# EAGLE board LEDDriver (EAGLE 6.5.0)
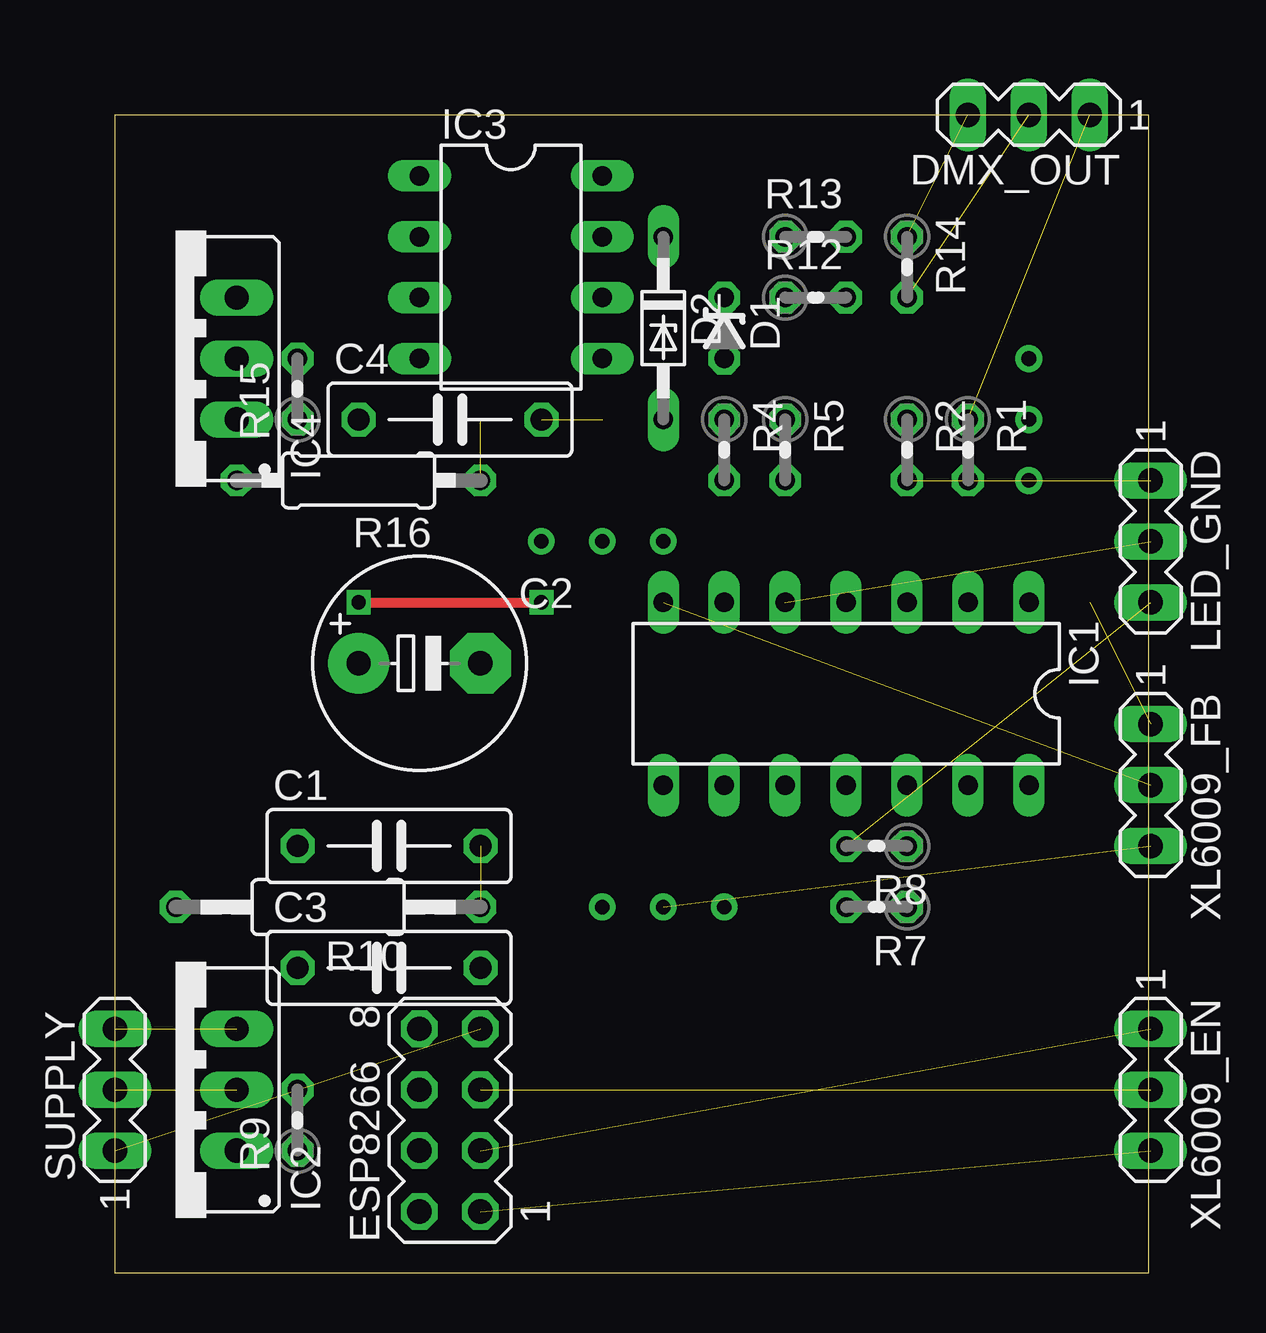
[diagram p0: board, top side]
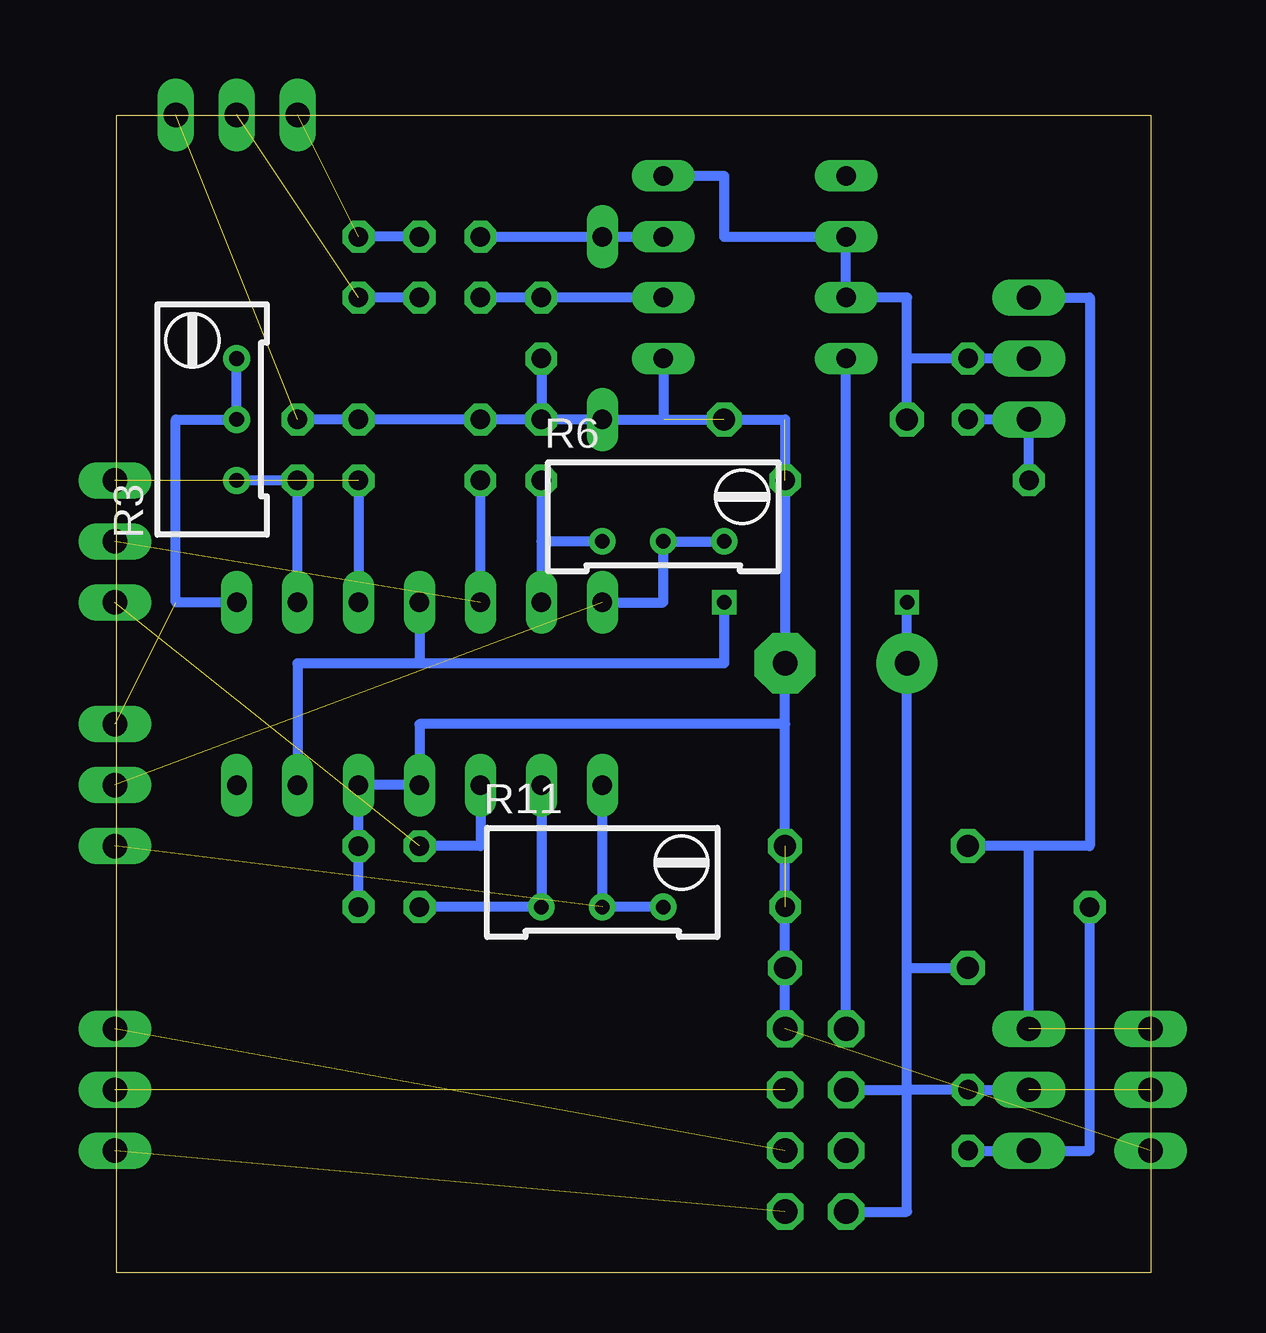
[diagram p1: board, bottom side, seen from below]

Size 43.1 x 48.25 mm. Coordinates in mm from the lower left corner, seen from the top.
Outline: 0,0 43.1,0 43.1,48.25 0,48.25 0,0
Copper layers (1*16): Top 0.035mm / dielectric 1.5mm / Bottom 0.035mm
Design rules "default": minimum track width 10mil, minimum drill 24mil, track to track 8mil, track to pad 8mil, pad to pad 8mil, via to via 8mil, smd to smd 8mil, copper to edge 40mil, drill to drill 8mil, minimum pad ring 10mil, minimum via ring 8mil, stop-mask expansion 4mil, vias tented up to drill 0mil, thermal gap 10mil

## Footprints (pad centres in the part's own frame; a part is rotated, then mirrored left to right if it is on the bottom)
C075-032X103 = drill 0.914 octagon: 1 -3.81,0; 2 3.81,0
E5-8,5 = drill 1.016 pad 2.54: + -2.54,0 | drill 1.016 pad 2.54 octagon: - 2.54,0
ZDIO-2.5 = drill 0.813 octagon: A 1.27,0; C -1.27,0
DO34Z7 = drill 0.813 long: A 3.81,0; C -3.81,0
MA03-1 = drill 1.016 long: 1 -2.54,0; 2 0,0; 3 2.54,0
MA04-2 = drill 1.016 octagon: 1 -3.81,-1.27; 2 -3.81,1.27; 3 -1.27,-1.27; 4 -1.27,1.27; 5 1.27,-1.27; 6 1.27,1.27; 7 3.81,-1.27; 8 3.81,1.27
DIL14 = drill 0.813 long: 1 -7.62,-3.81; 2 -5.08,-3.81; 3 -2.54,-3.81; 4 0,-3.81; 5 2.54,-3.81; 6 5.08,-3.81; 7 7.62,-3.81; 8 7.62,3.81; 9 5.08,3.81; 10 2.54,3.81; 11 0,3.81; 12 -2.54,3.81; 13 -5.08,3.81; 14 -7.62,3.81
317TS = drill 1.016 long: 1 -2.54,-2.54; 2 0,-2.54; 3 2.54,-2.54
DIL08 = drill 0.813 long: 1 -3.81,-3.81; 2 -1.27,-3.81; 3 1.27,-3.81; 4 3.81,-3.81; 5 3.81,3.81; 6 1.27,3.81; 7 -1.27,3.81; 8 -3.81,3.81
0204V = drill 0.813 octagon: 1 -1.27,0; 2 1.27,0
RTRIM64W = drill 0.61: 1 1.27,-2.54; 2 1.27,0; 3 1.27,2.54
0207/12 = drill 0.813 octagon: 1 -6.35,0; 2 6.35,0
0207/10 = drill 0.813 octagon: 1 -5.08,0; 2 5.08,0

## Placement (x,y rotation side)
C1  100n  [C075-032X103]  11.43,17.78 0 top
C2  100µ  [E5-8,5]  12.7,25.4 0 top
C3  100n  [C075-032X103]  11.43,12.7 0 top
C4  100n  [C075-032X103]  13.97,35.56 0 top
D1  [ZDIO-2.5]  25.4,39.37 270 top
D2  [DO34Z7]  22.86,39.37 270 top
DMX_OUT  [MA03-1]  38.1,48.26 180 top
ESP8266  [MA04-2]  13.97,6.35 90 top
IC1  LM324N  [DIL14]  30.48,24.13 180 top
IC2  LM317  [317TS]  2.54,7.62 90 top
IC3  75176AP  [DIL08]  16.51,41.91 270 top
IC4  LM317  [317TS]  2.54,38.1 90 top
LED_GND  [MA03-1]  43.18,30.48 270 top
R1  240  [0204V]  35.56,34.29 270 top
R2  0R1  [0204V]  33.02,34.29 270 top
R3  10k  [RTRIM64W]  39.37,35.56 0 bottom
R4  240  [0204V]  25.4,34.29 270 top
R5  0R1  [0204V]  27.94,34.29 270 top
R6  10k  [RTRIM64W]  20.32,31.75 270 bottom
R7  240  [0204V]  31.75,15.24 180 top
R8  0R1  [0204V]  31.75,17.78 180 top
R9  240  [0204V]  7.62,6.35 90 top
R10  390  [0207/12]  8.89,15.24 180 top
R11  10k  [RTRIM64W]  22.86,16.51 270 bottom
R12  22  [0204V]  29.21,40.64 0 top
R13  22  [0204V]  29.21,43.18 0 top
R14  120  [0204V]  33.02,41.91 270 top
R15  240  [0204V]  7.62,36.83 90 top
R16  720  [0207/10]  10.16,33.02 180 top
SUPPLY  [MA03-1]  0,7.62 90 top
XL6009_EN  [MA03-1]  43.18,7.62 270 top
XL6009_FB  [MA03-1]  43.18,20.32 270 top

## Library data of the parts
C1-C4 R1-R16 = rcl
D1 D2 = diode
DMX_OUT ESP8266 LED_GND SUPPLY XL6009_EN XL6009_FB = con-lstb; OC_FARNELL: unknown; OC_NEWARK: unknown
IC1 = linear
IC2 IC4 = v-reg
IC3 = 751xx

## Nets
+3V3: C2.+ C3.1 ESP8266.2 ESP8266.6 IC1.4 IC1.13 IC2.2 R9.2 SUPPLY.2
+5V: C4.1 IC3.2 IC3.3 IC3.8 IC4.2 R15.2
+12V: C1.1 IC2.3 IC4.3 SUPPLY.3
DMX2: DMX_OUT.2 R12.2 R14.2
GND: C1.2 C2.- C3.2 C4.2 D1.A D2.A DMX_OUT.1 ESP8266.7 IC1.11 IC1.12 IC3.5 R1.1 R2.1 R4.1 R5.1 R7.1 R8.1 R10.1 R16.1 SUPPLY.1
GPIO0: ESP8266.3 XL6009_EN.1
GPIO2: ESP8266.5 XL6009_EN.2
GPIO3: ESP8266.1 XL6009_EN.3
N$1: ESP8266.8 IC3.4
N$2: IC1.2 R1.2 R3.1
N$3: IC1.3 LED_GND.1 R2.2
N$4: IC1.1 R3.2 R3.3 XL6009_FB.1
N$5: IC2.1 R9.1 R10.2
N$6: IC1.5 LED_GND.2 R5.2
N$7: IC1.7 R6.2 R6.3 XL6009_FB.2
N$8: IC4.1 R15.1 R16.2
N$9: IC1.6 R4.2 R6.1
N$10: IC1.10 LED_GND.3 R8.2
N$11: IC1.8 R11.2 R11.3 XL6009_FB.3
N$12: IC1.9 R7.2 R11.1
N$14: D1.C IC3.6 R12.1
N$15: D2.C IC3.7 R13.1
N$16: DMX_OUT.3 R13.2 R14.1

## Tracks (layer width: path | path; a pad name or v marks a point on that pad's centre or on a via)
+3V3  (via drill 0.6)  (1 unrouted)
  Top 0.406: v10.16,27.94 v17.78,27.94
  Bottom 0.406: IC2.2 R9.2 10.16,7.62 | ESP8266.6 10.16,7.62 | ESP8266.2 10.16,2.54 10.16,7.62 | 10.16,12.7 C2.+ v10.16,27.94 | 10.16,7.62 10.16,12.7 | 10.16,12.7 C3.1 | IC1.4 30.48,25.4 | 30.48,25.4 35.56,25.4 IC1.13 | v17.78,27.94 17.78,25.4 30.48,25.4
+5V
  Bottom 0.406: IC3.8 17.78,45.72 17.78,43.18 IC3.2 IC3.3 10.16,40.64 10.16,38.1 | IC4.2 R15.2 10.16,38.1 | C4.1 10.16,38.1
+12V  (1 unrouted)
  Bottom 0.406: IC2.3 5.08,17.78 | 5.08,17.78 C1.1 | IC4.3 2.54,40.64 2.54,17.78 5.08,17.78
DMX2  (1 unrouted)
  Bottom 0.406: R12.2 R14.2
GND  (5 unrouted)
  Bottom 0.406: ESP8266.7 R10.1 | C3.2 R10.1 | R10.1 15.24,22.86 | 15.24,22.86 C2.- 15.24,35.56 20.32,35.56 | R7.1 R8.1 IC1.12 IC1.11 30.48,22.86 15.24,22.86 | R4.1 D2.A 20.32,35.56 | R4.1 R5.1 R2.1 R1.1 | IC3.5 20.32,35.56 | D1.A R4.1
GPIO0  (1 unrouted)
GPIO2  (1 unrouted)
GPIO3  (1 unrouted)
N$1
  Bottom 0.406: ESP8266.8 IC3.4
N$2
  Bottom 0.406: IC1.2 R1.2 R3.1
N$3  (1 unrouted)
  Bottom 0.406: R2.2 IC1.3
N$4  (1 unrouted)
  Bottom 0.406: IC1.1 40.64,27.94 40.64,35.56 R3.2 R3.3
N$5
  Bottom 0.406: R9.1 IC2.1 2.54,5.08 R10.2
N$6  (1 unrouted)
  Bottom 0.406: IC1.5 R5.2
N$7  (1 unrouted)
  Bottom 0.406: IC1.7 20.32,27.94 R6.2 R6.3
N$8
  Bottom 0.406: R16.2 IC4.1 R15.1
N$9
  Bottom 0.406: R4.2 25.4,30.48 | 25.4,30.48 IC1.6 | R6.1 25.4,30.48
N$10  (1 unrouted)
  Bottom 0.406: IC1.10 27.94,17.78 R8.2
N$11  (1 unrouted)
  Bottom 0.406: R11.3 R11.2 IC1.8
N$12
  Bottom 0.406: IC1.9 R11.1 R7.2
N$14
  Bottom 0.406: IC3.6 D1.C R12.1
N$15
  Bottom 0.406: R13.1 D2.C IC3.7
N$16  (1 unrouted)
  Bottom 0.406: R13.2 R14.1